# Altium PCB TYPEC.pcbdoc
Units mm, origin at the board's own origin, x right, y up, seen from the top; angles counter-clockwise.
Board outline 23.14 x 21.07 mm, 2 copper layers (Top Layer, Bottom Layer); 1 components, 0 nets, 16 pads, 0 vias.
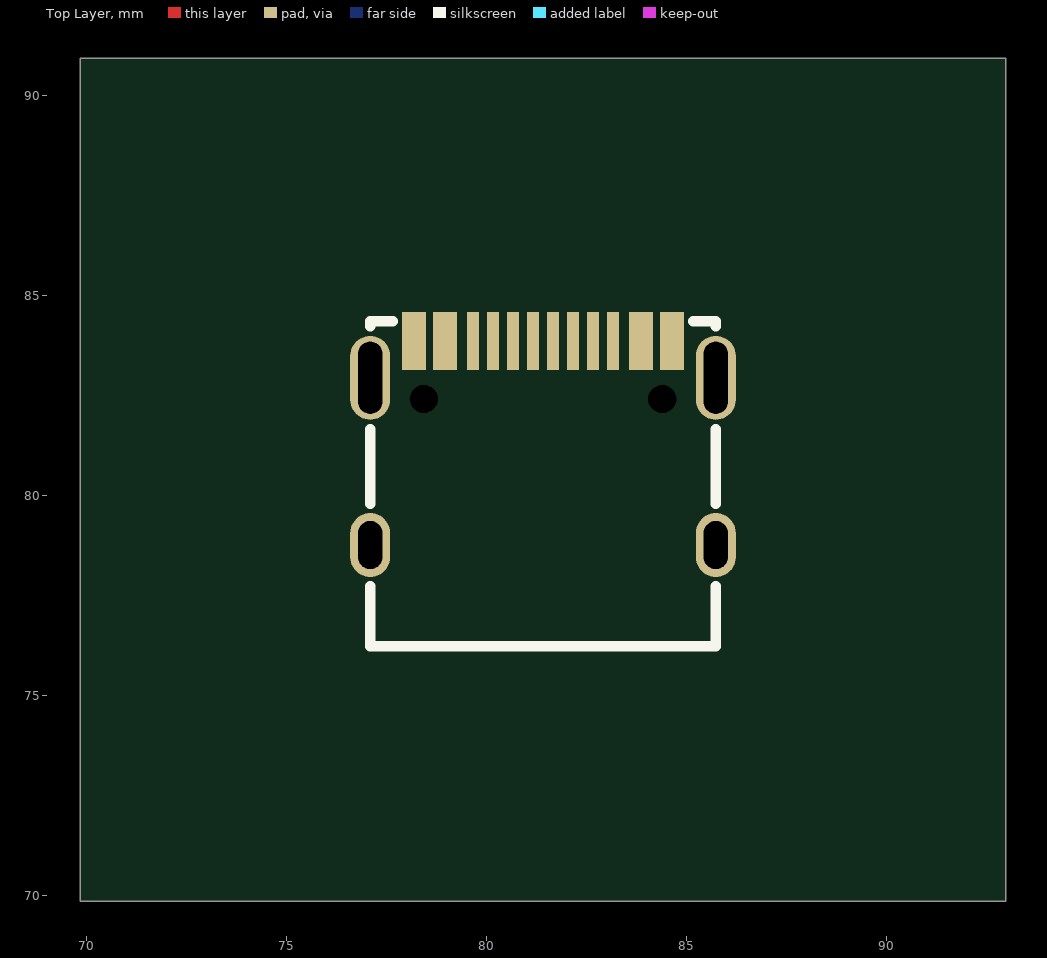
[diagram p0: Top Layer view]
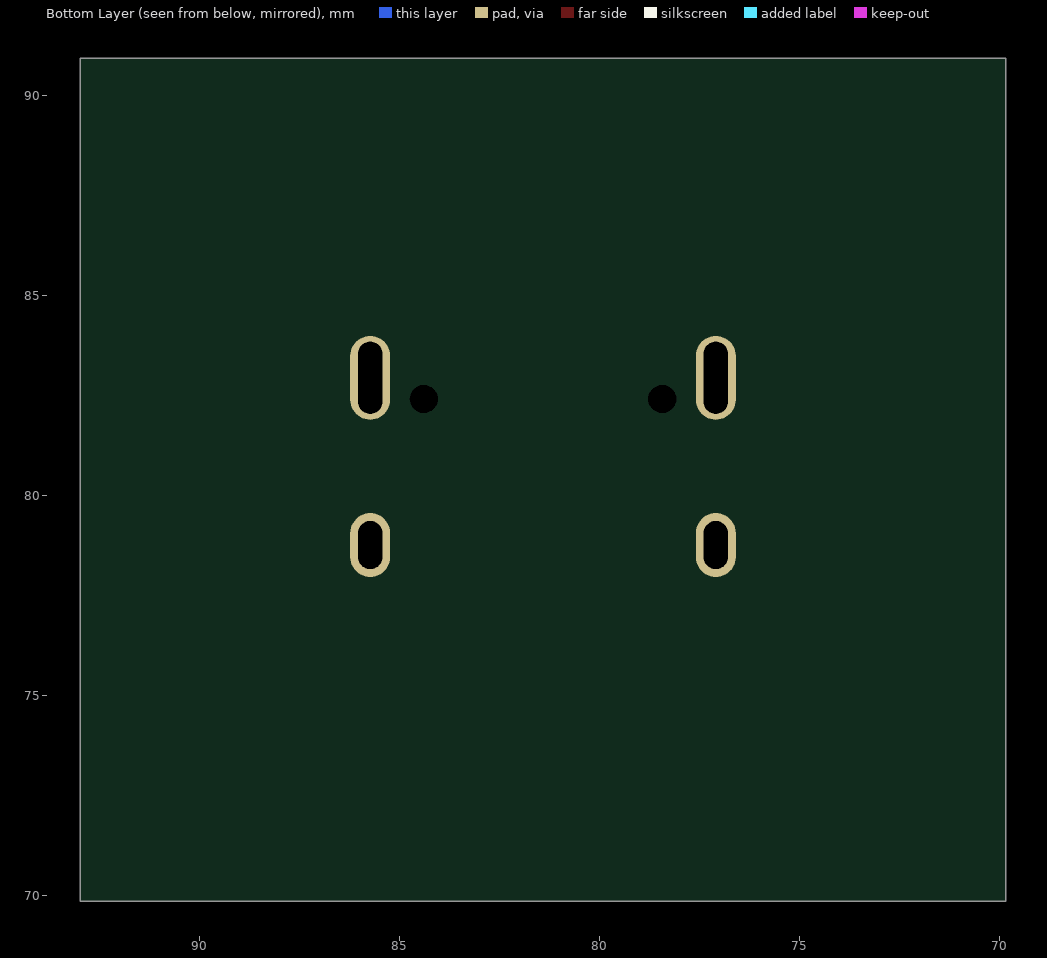
[diagram p1: Bottom Layer view, seen from below]

## Layer stack, top to bottom
Top Solder: solder mask 0.0102, Solder Resist, Dk 3.5
Top Layer: signal copper 0.0356
Dielectric 1: dielectric 0.32, FR-4, Dk 4.8
Bottom Layer: signal copper 0.0356
Bottom Solder: solder mask 0.0102, Solder Resist, Dk 3.5

## Board outline
92.992,69.85 69.85,69.85 69.85,90.923 92.992,90.923

## Components (designator, comment, footprint, x,y, rotation, side; value= is the part's Value field where it differs from the comment)
? "USB-C-SMD_TYPEC-304-BCP16" USB-C-SMD_TYPEC-304-BCP16 81.421,81.3 r0 top

## Footprints (in the part's own frame and the unit in brackets; to place one, negate y for a bottom-side part, rotate by r counter-clockwise, add the part's x,y. Pads: shape width x height; smd on the part's side, far side on the other; paste and mask are expansions set on the pad)
USB-C-SMD_TYPEC-304-BCP16 [mil]
  oval 39.4x82.7 hole 23.6 slot 70.9 at 90 deg: 13(-170.1,64.3) 14(170.1,64.3)
  oval 39.4x63 hole 23.6 slot 47.2 at 90 deg: 15(-170.1,-100.3) 16(170.1,-100.3)
  rect 23.6x57.1 smd: A1B12(-127,100.3) A4B9(-96.5,100.3) B1A12(126.8,100.3) B4A9(96.5,100.3)
  rect 11.8x57.1 smd: A5(-49.2,100.3) A6(-9.8,100.3) A7(9.8,100.3) A8(49.2,100.3) B5(68.9,100.3) B6(29.5,100.3) B7(-29.5,100.3) B8(-68.9,100.3)
  Multi-Layer board cut-out: 131.1,43.4 129.73,49.39 125.9,54.19 120.37,56.85 114.23,56.85 108.7,54.19 104.87,49.39 103.5,43.4 103.5,43.4 104.87,37.41 108.7,32.61 114.23,29.95 120.37,29.95 125.9,32.61 129.73,37.41 131.1,43.4
  Multi-Layer board cut-out: -103.5,43.4 -104.87,49.39 -108.7,54.19 -114.23,56.85 -120.37,56.85 -125.9,54.19 -129.73,49.39 -131.1,43.4 -131.1,43.4 -129.73,37.41 -125.9,32.61 -120.37,29.95 -114.23,29.95 -108.7,32.61 -104.87,37.41 -103.5,43.4
  silkscreen extent -170,-200 170,120

## Nets (pads, with @x,y where several pads share a name; then routed paths per layer and width w, separated by ;. In a path a pad name is that pad's centre, name@x,y a point inside that pad or via, vN(x,y) a via of type N, cw(c..) or ccw(c..) an arc to the next point about the centre after c; other vN are vias at no path point)
pads on no net: ?.13 ?.14 ?.15 ?.16 ?.A1B12 ?.A4B9 ?.A5 ?.A6 ?.A7 ?.A8 ?.B1A12 ?.B4A9 ?.B5 ?.B6 ?.B7 ?.B8